# Altium PCB receiver-d.PcbDoc
Units mil, origin at the board's own origin, x right, y up, seen from the top; angles counter-clockwise.
Board outline 1968.5 x 3897.64 mil, 2 copper layers (Top Layer, Bottom Layer); 41 components, 17 nets, 109 pads, 23 vias.
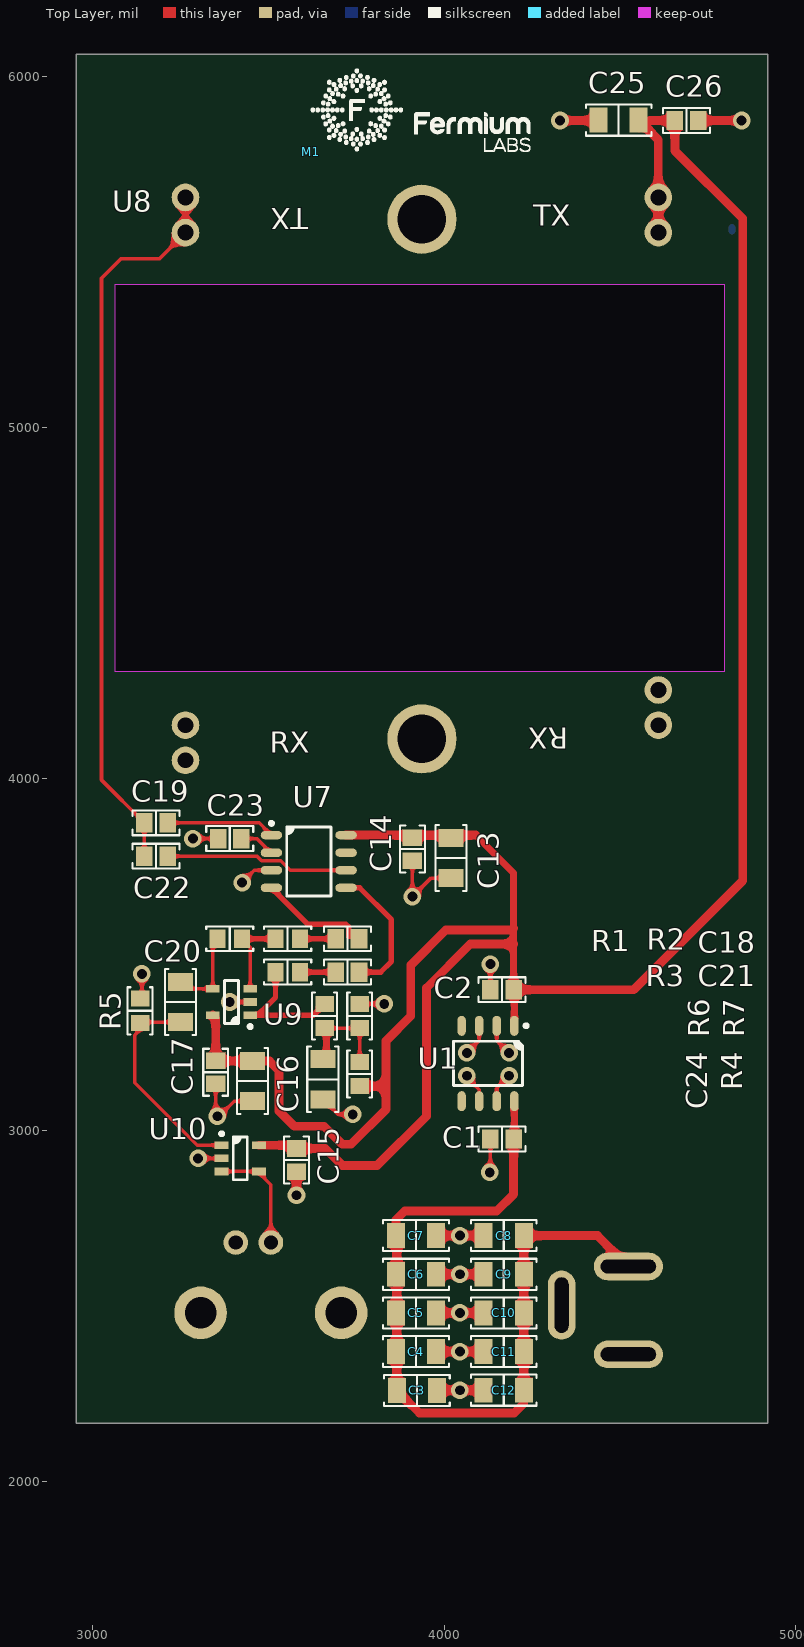
[diagram p0: Top Layer view]
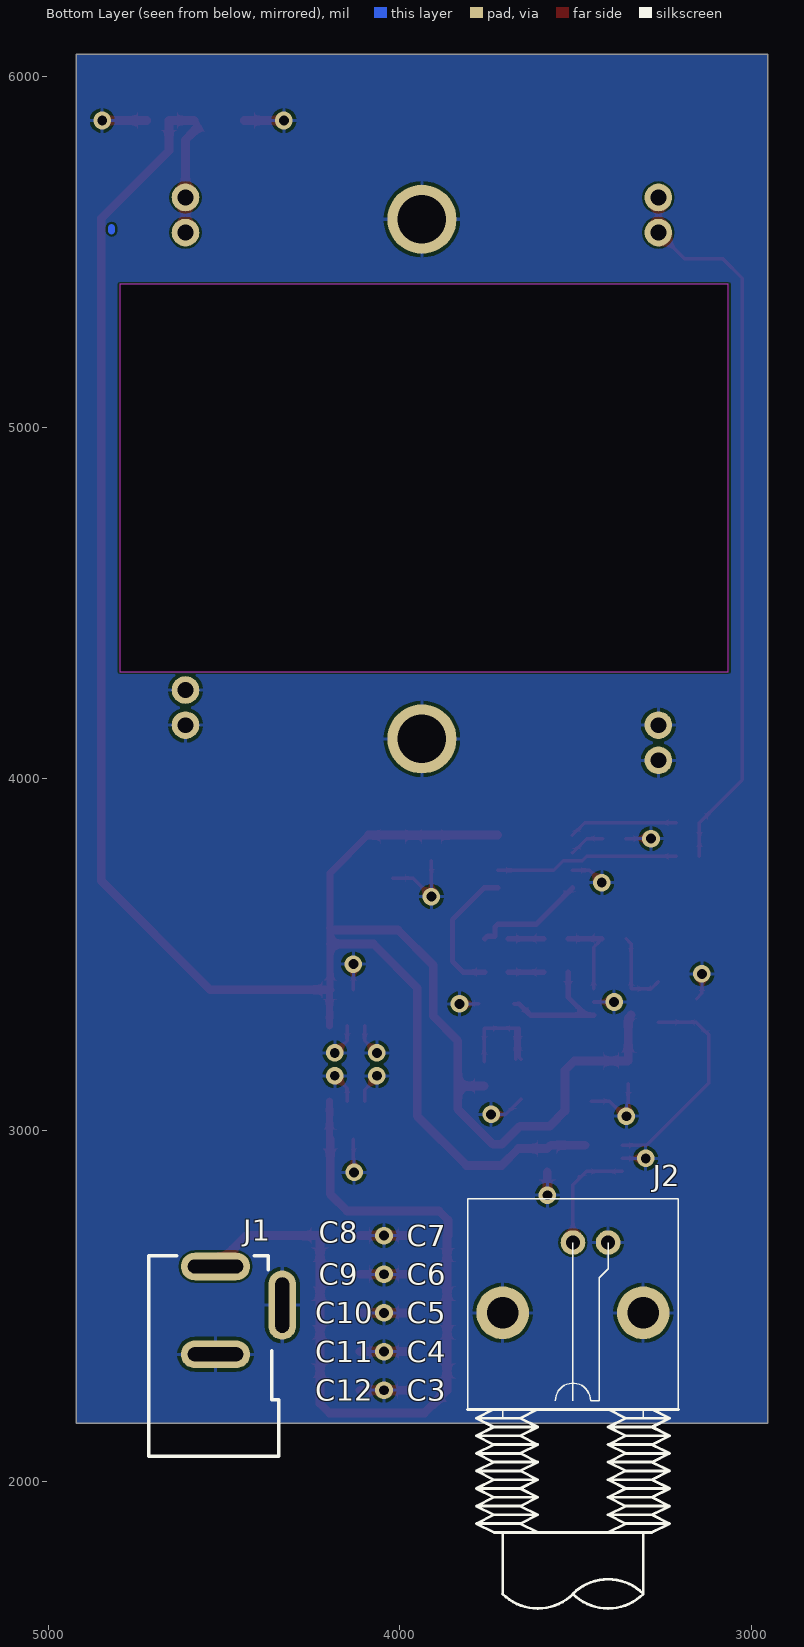
[diagram p1: Bottom Layer view, seen from below]
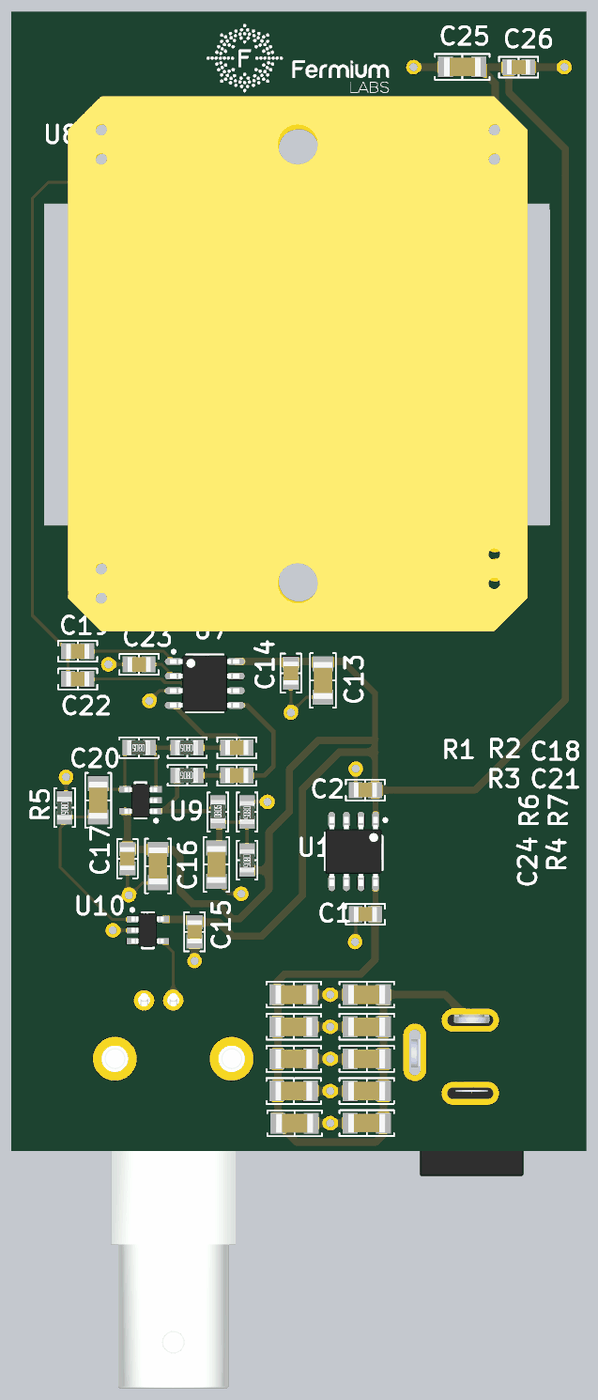
[diagram p2: 3D render of the assembled board from above, using the file's embedded part models]

## Layer stack, top to bottom
Top Solder: solder mask 0.4, Solder Resist, Dk 3.5
Top Layer: signal copper 1.4
Dielectric 1: dielectric 12.6, FR-4, Dk 4.8
Bottom Layer: signal copper 1.4
Bottom Solder: solder mask 0.4, Solder Resist, Dk 3.5

## Board outline
2952.76,2165.35 4921.26,2165.35 4921.26,6062.99 2952.76,6062.99

## Design rules (kind name [scope] priority, off if disabled: settings)
Clearance [All] p1: gap=6 ignorepadtopadclearanceinfootprint=FALSE
DiffPairsRouting [All] p1: maxlimit=10 minlimit=10 mostfreqgap=10 toplayer_minwidth=15 toplayer_maxwidth=15 toplayer_prefwidth=15 bottomlayer_minwidth=15 bottomlayer_maxwidth=15 bottomlayer_prefwidth=15 maxuncoupledlength=500
FanoutControl Fanout_LCC [All] p1 off: bgadir=Out bgaviamode=Centered fanoutstyle=Auto fanoutdirection=Alternating viagrid=1 // Protel DXP Scope 1 Expression Was: IsLCC   Fanout_LCC (Default Rule)
FanoutControl Fanout_BGA [All] p2 off: bgadir=Out bgaviamode=Centered fanoutstyle=Auto fanoutdirection=Alternating viagrid=1 // Protel DXP Scope 1 Expression Was: IsBGA   Fanout_BGA (Default Rule)
FanoutControl Fanout_SOIC [All] p3 off: bgadir=Out bgaviamode=Centered fanoutstyle=Auto fanoutdirection=Alternating viagrid=1 // Protel DXP Scope 1 Expression Was: IsSOIC   Fanout_SOIC (Default Rule)
FanoutControl Fanout_Default [All] p4: bgadir=Out bgaviamode=Centered fanoutstyle=Auto fanoutdirection=Alternating viagrid=1 // Fanout_Default (Default Rule)
FanoutControl Fanout_Small [All] p5 off: bgadir=Out bgaviamode=Centered fanoutstyle=Auto fanoutdirection=Alternating viagrid=1 // Protel DXP Scope 1 Expression Was: (CompPinCount < 5)   Fanout_Small (Default Rule)
HoleSize [All] p1: absolutevalues=TRUE maxlimit=99999 minlimit=11.81 maxpercent=80.000 minpercent=20.000
MinimumSolderMaskSliver [All] p1: minsoldermaskwidth=7.87
PolygonConnect [All] p1: connectstyle=Relief reliefconductorwidth=10 reliefentries=4 polygonreliefangle="90 Angle" airgapwidth=10
RoutingVias [All] p1: holewidth=28 width=50 viastyle="Through Hole" minholewidth=28 minwidth=50 maxholewidth=28 maxwidth=50
SilkToSilkClearance [All] p1: silktosilkclearance=7.87
SilkToSolderMaskClearance [All] p1 off: minsilkscreentomaskgap=10 clearancetoexposedcopper=TRUE // Protel DXP Scope 1 Expression Was: IsPad
SolderMaskExpansion [All] p1: expansion=2
Width [All] p1: maxlimit=200 minlimit=6 preferedwidth=10
20 further rules are at their usual default settings.

## Classes and differential pairs
differential pair OUT: +OUT_P -OUT_N
differential pair OUT_2: +OUT_2_P -OUT_2_N
differential pair OUT_1: +OUT_1_P -OUT_1_N

## Components (designator, comment, footprint, x,y, rotation, side; value= is the part's Value field where it differs from the comment)
C1 "" "CAP 0805/2012" 4165,2975 r180 top
C2 "" "CAP 0805/2012" 4165,3400 r180 top
C3 "" "CAP 1206/3216" 3922.64,2259.45 r0 top
C4 "" "CAP 1206/3216" 3920,2370 r0 top
C5 "" "CAP 1206/3216" 3920,2480 r0 top
C6 "" "CAP 1206/3216" 3920,2590 r0 top
C7 "" "CAP 1206/3216" 3920,2700 r0 top
C8 "" "CAP 1206/3216" 4170,2700 r180 top
C9 "" "CAP 1206/3216" 4170,2590 r180 top
C10 "" "CAP 1206/3216" 4170,2480 r180 top
C11 "" "CAP 1206/3216" 4170,2370 r180 top
C12 "" "CAP 1206/3216" 4170,2260 r180 top
C13 "" "CAP 1206/3216" 4020,3775 r270 top
C14 "" "CAP 0805/2012" 3910,3800 r270 top
C15 "" "CAP 0805/2012" 3580,2915 r270 top
C16 "" "CAP 1206/3216" 3455,3140 r270 top
C17 "" "CAP 0805/2012" 3350,3165 r270 top
C18 "" "CAP 0805/2012" 3725,3545 r180 top
C19 "" "CAP 0805/2012" 3180,3875 r0 top value=1nF
C20 "" "CAP 1206/3216" 3250,3365 r270 top
C21 "" "CAP 0805/2012" 3725,3450 r180 top
C22 "" "CAP 0805/2012" 3180,3780 r0 top value=1nF
C23 "" "CAP 0805/2012" 3390,3830 r180 top
C24 "" "CAP 1206/3216" 3655,3145 r270 top
C25 "" "CAP 1206/3216" 4497,5875 r180 top
C26 "" "CAP 0805/2012" 4690,5874 r0 top
J1 "" dc-jack 4524.56,2612.2 r270 bottom
J2 "" BNC-RA 3707.09,2480.32 r0 bottom
M1 "fermiumlabs-logo" frm-med 3620,5785 r0 top
R1 "Res1" "RES 0805/2012" 3390,3545 r180 top value=220K
R2 "Res1" "RES 0805/2012" 3555,3545 r180 top value=10K
R3 "Res1" "RES 0805/2012" 3555,3450 r180 top value=10K
R4 "Res1" "RES 0805/2012" 3760,3160 r270 top value=10K
R5 "Res1" "RES 0805/2012" 3135,3340 r270 top value=10K
R6 "Res1" "RES 0805/2012" 3660,3325 r90 top value=220K
R7 "Res1" "RES 0805/2012" 3760,3325 r270 top value=10K
U1 "L78L05ACD" "ST SOIC-8N" 4125,3190 r270 top
U7 "SA612A" "TI SOIC-8 D" 3615,3765 r0 top
U8 "HB100" HB100-BURIED 3264,5655 r270 top
U9 "U*" "TI SOT-23-5 DBV" 3395,3365 r180 top
U10 "U*" "TI SOT-23-5 DBV" 3420,2920 r0 top

## Footprints (in the part's own frame and the unit in brackets; to place one, negate y for a bottom-side part, rotate by r counter-clockwise, add the part's x,y. Pads: shape width x height; smd on the part's side, far side on the other; paste and mask are expansions set on the pad)
BNC-RA [mil]
  round 70 hole 40: 1(-200,-200) 2(-300,-200)
  round 150 hole 90: A(0,0) B(-400,0)
  silkscreen extent -500,-325 100,842, body extent -490,-280 91,1127, height 619
"CAP 0805/2012" [mm] "Chip Capacitor, 2-Leads, Body 2.00x1.20mm, IPC Medium Density"
  rect 1.2x1.4 smd: 1(-0.838,0) 2(0.838,0)
  silkscreen extent -1.7,-0.9 1.7,0.9, body extent -1,-0.64 1,0.64, height 1.26
"CAP 1206/3216" [mm] "Chip Capacitor, 2-Leads, Body 3.25x1.60mm, IPC Medium Density"
  rect 1.3x1.8 smd: 1(-1.45,0) 2(1.45,0)
  silkscreen extent -2.37,-1.12 2.37,1.12, body extent -1.6,-0.81 1.6,0.81, height 1.62
dc-jack [mm]
  oval 2x5 hole 1 slot 4 at 90 deg: 1(0,0) 3(6.35,0)
  oval 5x2 hole 1 slot 4 at 0 deg: 2(2.794,4.826)
  silkscreen extent -0.76,-4.83 13.72,4.57, body extent -0.76,-4.62 13.54,5.13, height 11.3
frm-med [mil]
  silkscreen extent 1,1 626,237
HB100-BURIED [mm]
  round 2 hole 1.143: 1(0,34.188) 1(2.54,34.188) 2(0,0) 2(2.54,0) 3(38.151,0) 3(40.691,0) 4(35.611,34.188) 4(38.151,34.188)
  round 5 hole 3.5: 5(1.575,17.094) 5(39.141,17.094)
  Keep-Out Layer board cut-out: 6.286,38.934 34.286,38.934 34.286,-5.066 6.286,-5.066
  body extent -3.02,-3 43.48,37, height 3
"RES 0805/2012" [mm] "Chip Resistor, 2-Leads, Body 2.00x1.25mm, IPC Medium Density"
  rect 1.15x1.35 smd: 1(-0.875,0) 2(0.875,0)
  silkscreen extent -1.7,-0.9 1.7,0.9, body extent -0.95,-0.62 1.05,0.63, height 0.6
"ST SOIC-8N" [mm] "SOIC, 8-Leads, Body 4.90x3.90mm, Pitch 1.27mm, IPC Medium Density"
  oval 1.45x0.6 smd: 1(-2.725,1.905) 2(-2.725,0.635) 3(-2.725,-0.635) 4(-2.725,-1.905) 5(2.725,-1.905) 6(2.725,-0.635) 7(2.725,0.635) 8(2.725,1.905)
  silkscreen extent -2.85,-2.5 1.6,2.88, body extent -3.01,-2.45 3.01,2.45, height 1.5
"TI SOIC-8 D" [mm] "SOP, 8-Leads, Body 4.90x3.90mm, Pitch 1.27mm, IPC Medium Density"
  oval 1.55x0.6 smd: 1(-2.7,1.905) 2(-2.7,0.635) 3(-2.7,-0.635) 4(-2.7,-1.905) 5(2.7,-1.905) 6(2.7,-0.635) 7(2.7,0.635) 8(2.7,1.905)
  silkscreen extent -2.82,-2.5 1.6,2.88, body extent -3.01,-2.45 3.01,2.45, height 1.5
"TI SOT-23-5 DBV" [mm] "SOT23, 5-Leads, Body 2.90x2.80mm, Pitch 0.95mm, IPC Medium Density"
  rect 1x0.55 smd: 1(-1.35,0.95) 2(-1.35,0) 3(-1.35,-0.95) 4(1.35,-0.95) 5(1.35,0.95)
  silkscreen extent -1.48,-1.55 0.5,1.9, body extent -1.44,-1.43 1.39,1.48, height 1.5

## Part data
C1 C2 C14 C15 C17 C18 C21 C23 C26: library part Cap2, "Capacitor", Capacitance=100nF, Capacitor kind=MLCC, Capacitor type=ceramic, Case - inch=0805, Case - mm=2012, Dielectric=X7R, Manufacturer=YAGEO, Manufacturer Part Number=CC0805JRX7R9BB104, Operating voltage=50V, Supplier Part Number 1=CC0805JRX7R9104, Tolerance=±5%, Category="0805 MLCC SMD Capacitors", ComponentLink1Description=http://static.tme.eu/products_pics/d/b/b/dbbd93eaf25225110ca26eb66da77328/58538.jpg, ComponentLink1URL=http://static.tme.eu/products_pics/d/b/b/dbbd93eaf25225110ca26eb66da77328/58538.jpg, MinAmount=100, Mounting=SMD, Multiples=100, Pads="2 SMD", Price Type=NET, Pricing 1="100=0.00613, 300=0.00464, 1000=0.00342, 4000=0.00284, 20000=0.00273 (EUR)", Stock 1=89911, SuppliedAmount=0, Supplier 1=TME, Unit=pcs, Weight=0.042
C3 C4 C5 C6 C7 C8 C9 C10 C11 C12 C13 C16 C20 C24 C25: library part Cap2, "Capacitor", Capacitance=10µF, Capacitor kind=MLCC, Capacitor type=ceramic, Case - inch=1206, Case - mm=3216, Dielectric=X5R, Manufacturer=SAMSUNG, Manufacturer Part Number=CL31A106KAHNNNE, Operating temperature=-55...85°C, Operating voltage=25V, Tolerance=±10%, Category="1206 MLCC SMD Capacitors", ComponentLink1Description=http://static.tme.eu/products_pics/b/e/9/be9e0dd298dcf4979ea1dd3d226e0bfa/58780.jpg, ComponentLink1URL=http://static.tme.eu/products_pics/b/e/9/be9e0dd298dcf4979ea1dd3d226e0bfa/58780.jpg, MinAmount=100, Mounting=SMD, Multiples=100, PackageDescription=1206, PackageReference=CAPR5-4X5, Pads="2 SMD", Price Type=NET, Pricing 1="100=0.0248, 300=0.0203, 1000=0.0167, 2000=0.0131, 10000=0.0127 (EUR)", Published=23-Sep-2002, Publisher="Altium Limited", Stock 1=279700, SuppliedAmount=0, Supplier 1=TME, Supplier Part Number 1=CL31A106KAHNNNE, Unit=pcs, Weight=0.061
C19 C22: library part Cap, "Capacitor", Capacitance=1nF, Case/Package=0805, Case Code (Metric)=2012, Dielectric=X7R, Manufacturer=Samsung, Manufacturer Part Number=CL21B102KCANNNC, Max Operating Temperature=125°C, Min Operating Temperature=-55°C, Package Quantity=1, Tolerance=10%, Voltage=100V, Case Code (Imperial)=0805, ComponentLink1Description=https://datasheet.ciiva.com/26878/getdatasheetpartid-643098-26878049.pdf, ComponentLink1URL=https://datasheet.ciiva.com/26878/getdatasheetpartid-643098-26878049.pdf, ComponentLink2Description=https://datasheet.ciiva.com/29199/456063-da-01-en-vs-kondensator-0805-29199067.pdf, ComponentLink2URL=https://datasheet.ciiva.com/29199/456063-da-01-en-vs-kondensator-0805-29199067.pdf, ComponentLink3Description=https://datasheet.ciiva.com/26310/mlcc-catalogdownload2013-eng-26310183.pdf, ComponentLink3URL=https://datasheet.ciiva.com/26310/mlcc-catalogdownload2013-eng-26310183.pdf, Depth=1.25mm, Height=0.65mm, Lead Free="Lead Free", Length=2mm, Material=Ceramic, Mount="Surface Mount", Packaging="Tape and Reel", Pricing 1="100=0.0073, 300=0.0056, 1000=0.0044, 4000=0.0032, 20000=0.0031 (USD)", Radiation Hardening=No, Stock 1=40500, Supplier 1=TME, Supplier Part Number 1=CL21B102KCANNNC, Thickness=0.03inch, Voltage Rating=100V, Voltage Rating (DC)=100V, Width=0.049inch
J1: library part jackdc, Manufacturer=CLIFF, Manufacturer Part Number="DC-10A FC68148", Package type="in bulk", Rated current=5A, Rated voltage="12V DC", Supplier Part Number 1=FC68148, Category="DC power connectors", ComponentLink1Description=http://static.tme.eu/products_pics/f/8/e/f8eb2e1bea4ffe6692f5958f8ef9edd4/323250.jpg, ComponentLink1URL=http://static.tme.eu/products_pics/f/8/e/f8eb2e1bea4ffe6692f5958f8ef9edd4/323250.jpg, Connector=socket, Connector type="DC supply", Connector variant="with on/off switch", Contact size=5,5/2,1mm, Electrical mounting=soldering, MinAmount=1, Multiples=1, Pads="3 THT", Plug inside diameter=2.1mm, Plug outside diameter=5.5mm, Price Type=NET, Pricing 1="1=0.4194, 20=0.3065, 100=0.2581, 500=0.2258 (USD)", Spatial orientation="angled 90°", Stock 1=20287, SuppliedAmount=0, Supplier 1=TME, Unit=pcs, Weight=1.733
J2: library part BNC-PCB-RA, "connector bnc", Manufacturer="TE CONNECTIVITY", Manufacturer Part Number=1-1337543-0, Category="BNC connectors", ComponentLink1Description=http://static.tme.eu/products_pics/6/3/2/63240353f8a8790dbe8f7bd93b014c1a/378606.jpg, ComponentLink1URL=http://static.tme.eu/products_pics/6/3/2/63240353f8a8790dbe8f7bd93b014c1a/378606.jpg, Connector=socket, Connector type=BNC, Connector variant=insulated, Contact plating="gold plated", Electrical mounting=THT, Insulator material=polyester, Mechanical mounting="on PCBs", MinAmount=1, Multiples=1, Pads="4 THT", Price Type=NET, Pricing 1="1=1.22, 25=1.1, 100=0.98, 1000=0.86 (EUR)", Spatial orientation="angled 90°", Stock 1=44, SuppliedAmount=0, Supplier 1=TME, Supplier Part Number 1=1-1337543-0, Unit=pcs, Wave impedance=50O, Weight=13.22
R1 R6: "Resistor", Manufacturer="Royal Electronic Factory", Manufacturer Part Number=0805S8J0224T5E, Supplier Part Number 1=SMD0805-220K, Pricing 1="100=0.0065, 1000=0.0025, 5000=0.0009, 15000=0.0008, 50000=0.0008 (USD)", Stock 1=102100, Supplier 1=TME
R2 R3 R4 R5 R7: "Resistor", Manufacturer="Royal Electronic Factory", Manufacturer Part Number=0805S8J0103T5E, Supplier Part Number 1=SMD0805-10K, Pricing 1="100=0.0065, 1000=0.0023, 5000=0.0008, 15000=0.0008, 50000=0.0008 (USD)", Stock 1=1600500, Supplier 1=TME
U7: Supplier Part Number 1=SA612AD, Supplier 1=TME, Supplier 2=Mouser, Supplier Part Number 2=771-SA612AD01112
U8: Manufacturer="China unspecified", Manufacturer Part Number=HB100, Supplier 1=Alibaba, Supplier Part Number 1=HB100
U9 U10: library part LMV321IDBVR, Supplier 1=TME, Supplier Part Number 1=LMV321IDBVR
U1: Supplier 1=TME, Supplier Part Number 1=L78L05ACD

## Via types
v1: diameter 50, hole 28, Top Layer to Bottom Layer, 23 vias

## Nets (pads, with @x,y where several pads share a name; then routed paths per layer and width w, separated by ;. In a path a pad name is that pad's centre, name@x,y a point inside that pad or via, vN(x,y) a via of type N, cw(c..) or ccw(c..) an arc to the next point about the centre after c; other vN are vias at no path point)
5V: C2.1 C13.1 C14.1 C15.1 C16.1 C17.1 C25.1 C26.1 R4.2 U1.1 U7.8 U8.1 U9.5 U10.5 | length 7263.8
  Top Layer w20: 4090,3840 4198,3732 4198,3575 4198,3530 C2.1 4200,3398 U1.1
  Top Layer w25: U9.5 3350,3319.45 C17.1 3350.91,3197.09 C16.1 3502.91,3197.09 3530,3170 3530,3055 3573.5,3011.5 3658.5,3011.5 3710,2960 3735,2960 3835,3060 3835,3125.55 ; U10.5 3570.6,2957.4 C15.1 3662,2948 3710,2900 3810,2900 3950,3040 3950,3405 4075,3530 4198,3530 ; U7.8 4090,3840 ; R4.2 3835,3125.55 ; C2.1 4540,3400 4850,3710 4850,5595 4657,5788 C26.1 4585.59,5874 ; 4198,3575 4193,3570 4005,3570 3905,3470 3905,3325 3835,3255 3835,3125.55 ; C25.1@4576.24,5852.85 4610,5819.09 4610,5655 U8.1@4610,5555
12V: C1.1 C3.1 C4.1 C5.1 C6.1 C7.1 C8.1 C9.1 C10.1 C11.1 C12.1 J1.1 U1.8 | length 2328.3
  Top Layer w20: C1.1 4200,2977 U1.8
  Top Layer w25: C1.1 4198,2818 4150,2770 3888.54,2770 3862.91,2744.37 C7.1 3865.55,2697.36 C3.1 3930,2195 4200,2195 4227.09,2222.09 C12.1 C11.1 C10.1 C9.1 C8.1 4436.76,2700 J1.1
GND: C1.2 C2.2 C3.2 C4.2 C5.2 C6.2 C7.2 C8.2 C9.2 C10.2 C11.2 C12.2 C13.2 C14.2 C15.2 C16.2 C17.2 C23.2 C24.2 C25.2 C26.2 J1.2 J1.3 J2.2 J2.A J2.B R5.1 R7.1 U1.2 U1.3 U1.6 U1.7 U7.3 U8.3 U8.4 U8.5 U9.2 U10.2 | length 2516.3
  Top Layer w10: v1(3140,3445) 3140,3389.45 R5.1@3155,3374.45 ; v1@3280,3830 v1(3285,3830) C23.2 ; v1@3290,2920 v1(3300,2920) U10.2 ; C17.2 3350,3030 3402.91,3082.91 C16.2 ; v1(3390,3365) U9.2 ; v1(3425,3705) 3460,3740 U7.3 ; C24.2 3697.91,3045 v1(3740,3045) ; R7.1@3775,3359.45 v1(3830,3359.45) ; C14.2 v1(3910,3665) 3962.91,3717.91 C13.2 ; v1@4065,3150 4100,3115 U1.6 ; v1(4065,3220) 4100,3255 U1.3 ; v1(4130,2880) 4132,2882 C1.2 ; C2.2 v1(4132,3473) ; U1.7 4150,3120 v1(4185,3155) ; U1.2 4150,3255 v1(4185,3220)
  Top Layer w25: v1(3580,2815) C15.2 ; J2.A J2.A@3707.4,2480 ; C3.2@3977.09,2262.09 C3.2 3980.28,2260 v1(4045,2260) C12.2 ; C4.2 v1(4045,2370) C11.2 ; C5.2 v1(4045,2480) C10.2 ; C6.2 v1(4045,2590) C9.2 ; C7.2 v1(4045,2700) C8.2 ; v1(4330,5874) C25.2@4442.91,5874 ; C26.2@4720,5874 C26.2 v1(4847,5874)
  other v1: 3355,3040 4065,3155
NetC19_1: C19.1 C22.1 U8.2 | length 2088.4
  Top Layer w10: C22.1 C19.1 3025,3997 3025,5425 3080,5480 3189,5480 3264,5555 U8.2@3264,5655
NetC19_2: C19.2 U7.1 | length 310.2
  Top Layer w10: C19.2 3473.7,3875 U7.1
NetC20_1: C20.1 R1.2 U9.4 | length 233.3
  Top Layer w10: C20.1@3265,3422.09 3284.69,3402.4 U9.4 3341.85,3531.3 R1.2
NetC20_2: C20.2 R5.2 U10.1 | length 616.4
  Top Layer w10: C20.2@3265,3307.91 C20.2 3157.36,3307.91 3120,3270.55 3120,3135 3297.6,2957.4 U10.1
NetC22_2: C22.2 U7.6 | length 524.9
  Top Layer w10: C22.2 3467.74,3780 3480.55,3767.19 3534.82,3767.19 3562.01,3740 U7.6
NetC23_1: C23.1 U7.2 | length 102.3
  Top Layer w10: C23.1 3467.74,3830 3507.74,3790 U7.2
NetC24_1: C24.1 R4.1 R6.1 R7.2 | length 377.2
  Top Layer w10: C24.1 3660,3207.09 R6.1 R6.1@3675,3290.55 ; C24.1@3670,3202.09 3670,3285.55 R6.1@3675,3290.55 ; R4.1 R7.2 R6.1@3675,3290.55
NetJ2_1: J2.1 U10.3 U10.4 | length 320.5
  Top Layer w10: U10.3 3469.49,2882.6 3507.09,2845 J2.1
OUT_1_N: C21.2 R3.1 | length 102.6
  Top Layer w15: R3.1 C21.2
OUT_1_P: C18.2 R2.1 | length 102.6
  Top Layer w15: R2.1 C18.2
OUT_2_N: R3.2 R6.2 U9.1 | length 383.4
  Top Layer w10: R6.2 R6.2@3675,3359.45
  Top Layer w15: U9.1 3470,3327.6 ; R3.2 3520.55,3378.15 3470,3327.6 ; R6.2 3628.15,3327.6 3470,3327.6
OUT_2_P: R1.1 R2.2 U9.3 | length 248.5
  Top Layer w10: R1.1 3448.15,3521.3 U9.3
  Top Layer w15: R1.1 R2.2
OUT_N: C21.1 U7.5 | length 390.4
  Top Layer w15: U7.5 3760,3690 3850,3600 3850,3480 3820,3450 C21.1
OUT_P: C18.1 U7.4 | length 324.4
  Top Layer w15: U7.4 3612.64,3586.06 3721.21,3586.06 3729.12,3578.15 3729.12,3552.5 3750.5,3552.5 C18.1
pads on no net: U1.4 U1.5 U7.7
copper on no net: | length 10
  Bottom Layer w20: 4820,5560 4820,5570

## Polygon pours and split planes (outlines as drawn)
GND on Bottom Layer "Bottom Layer-No Net" (solid, pour order 0): 2952.76,2165.35 4921.26,2165.35 4921.26,6062.99 2952.76,6062.99

## Silkscreen, mask and mechanical layers (free items; w line width, h text height)
Mechanical 1:
  lines w10: 2952.76,2165.35 2952.76,6062.99 4921.26,6062.99 4921.26,2165.35 2952.76,2165.35 ; 3067.16,4309.65 3067.16,5412.02 4799.44,5412.02 4799.44,4309.65 3067.16,4309.65

## Text inside footprints (layer, text, board x,y; h text height)
U8: Top Overlay "RX" at 4354,4145 h60 r180; Top Overlay "TX" at 3614,5625 h60 r180; Top Overlay "TX" at 4254,5575 h60; Top Overlay "RX" at 3504,4075 h60; Mechanical 1 "## CUT CUT CUT ## / ## CUT CUT CUT ## / ## CUT CUT CUT ## / ## CUT CUT CUT ## / ## CUT CUT CUT ## / ## CUT CUT CUT ## / ## CUT CUT CUT ## / ## CUT CUT CUT ## / ## CUT CUT CUT ## / ## CUT CUT CUT ## / ## CUT CUT CUT ## / ## CUT CUT CUT ## / ## CUT CUT CUT ## / ## CUT CUT CUT ## / ## CUT CUT CUT ## / ## CUT CUT CUT ## / ## CUT CUT CUT ## / ## CUT CUT CUT ##" at 3074,5365 h60 r270